# Altium PCB DAC904.PcbDoc
Units mm, origin at the board's own origin, x right, y up, seen from the top; angles counter-clockwise.
Board outline 70.36 x 53.47 mm, 2 copper layers (Top Layer, Bottom Layer); 39 components, 53 nets, 167 pads, 108 vias.
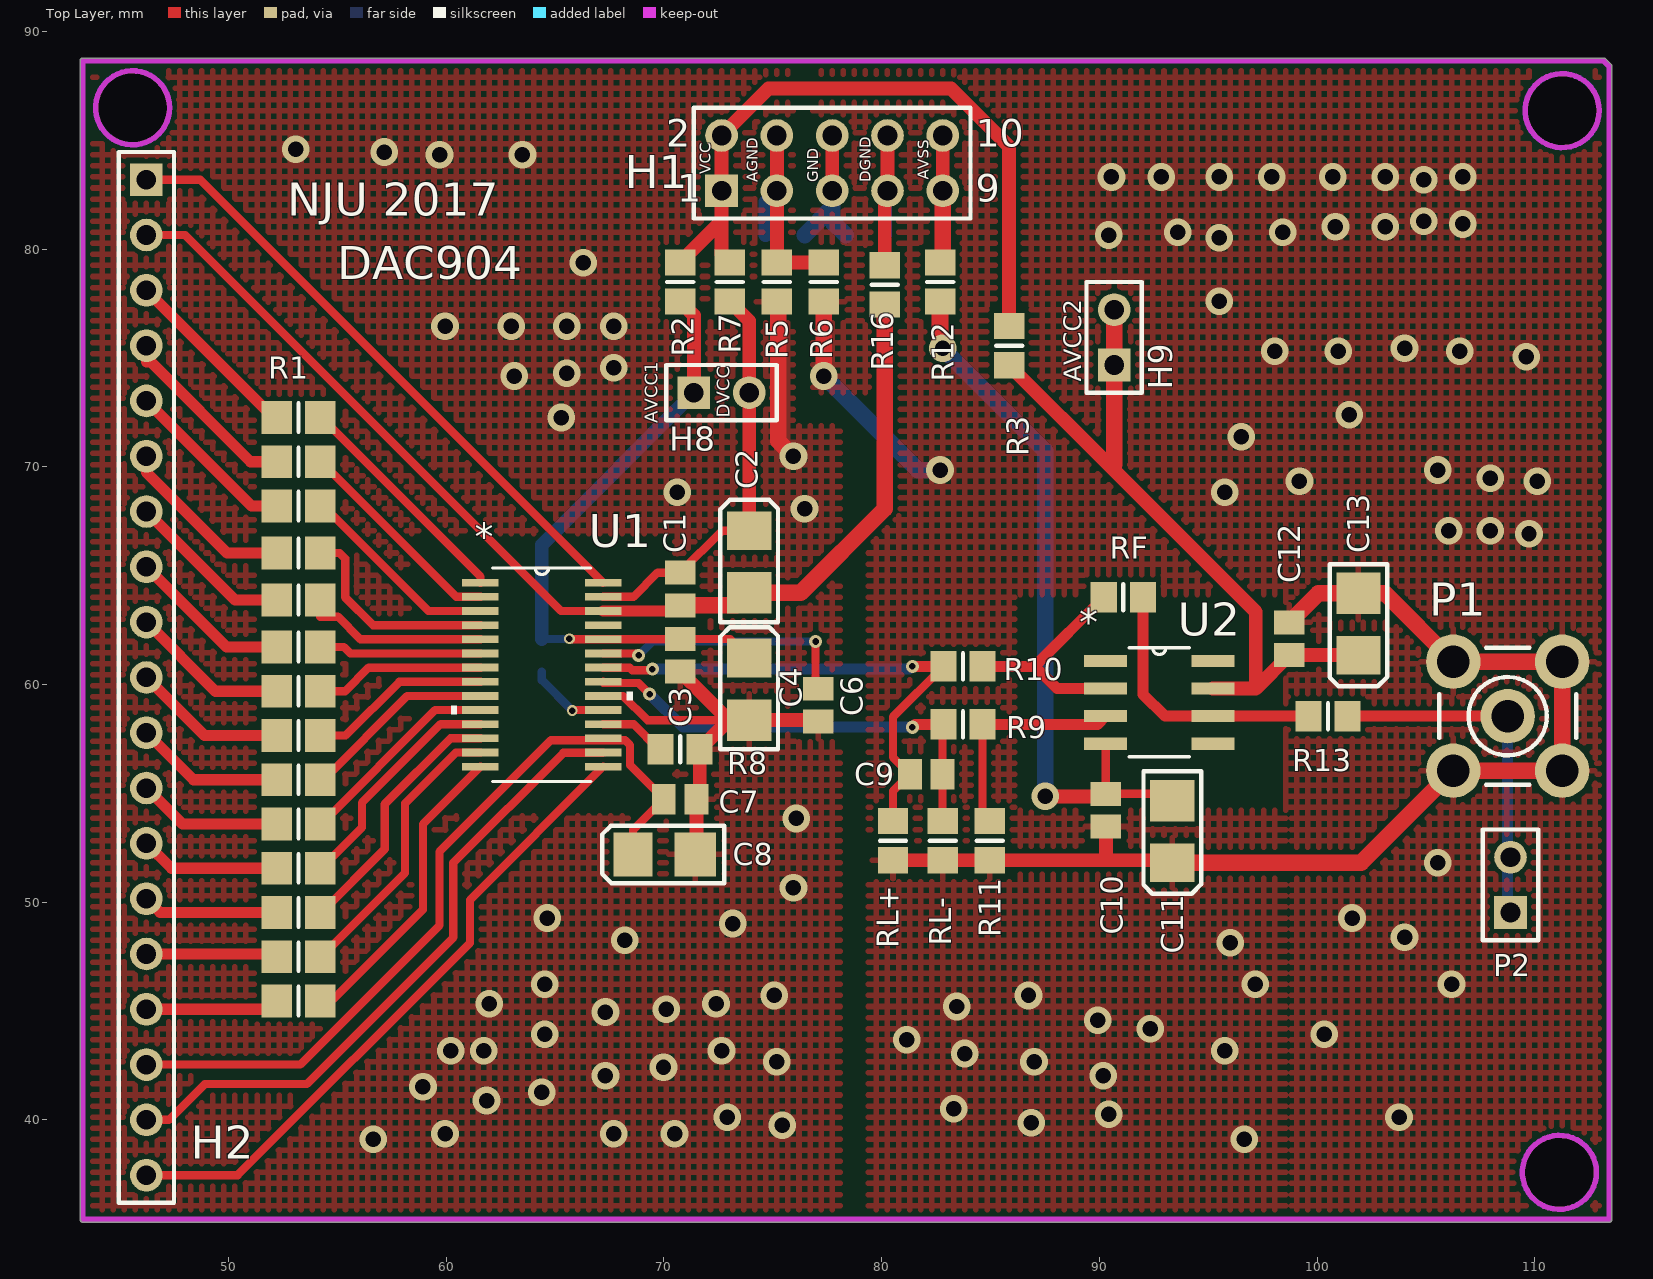
[diagram p0: Top Layer view]
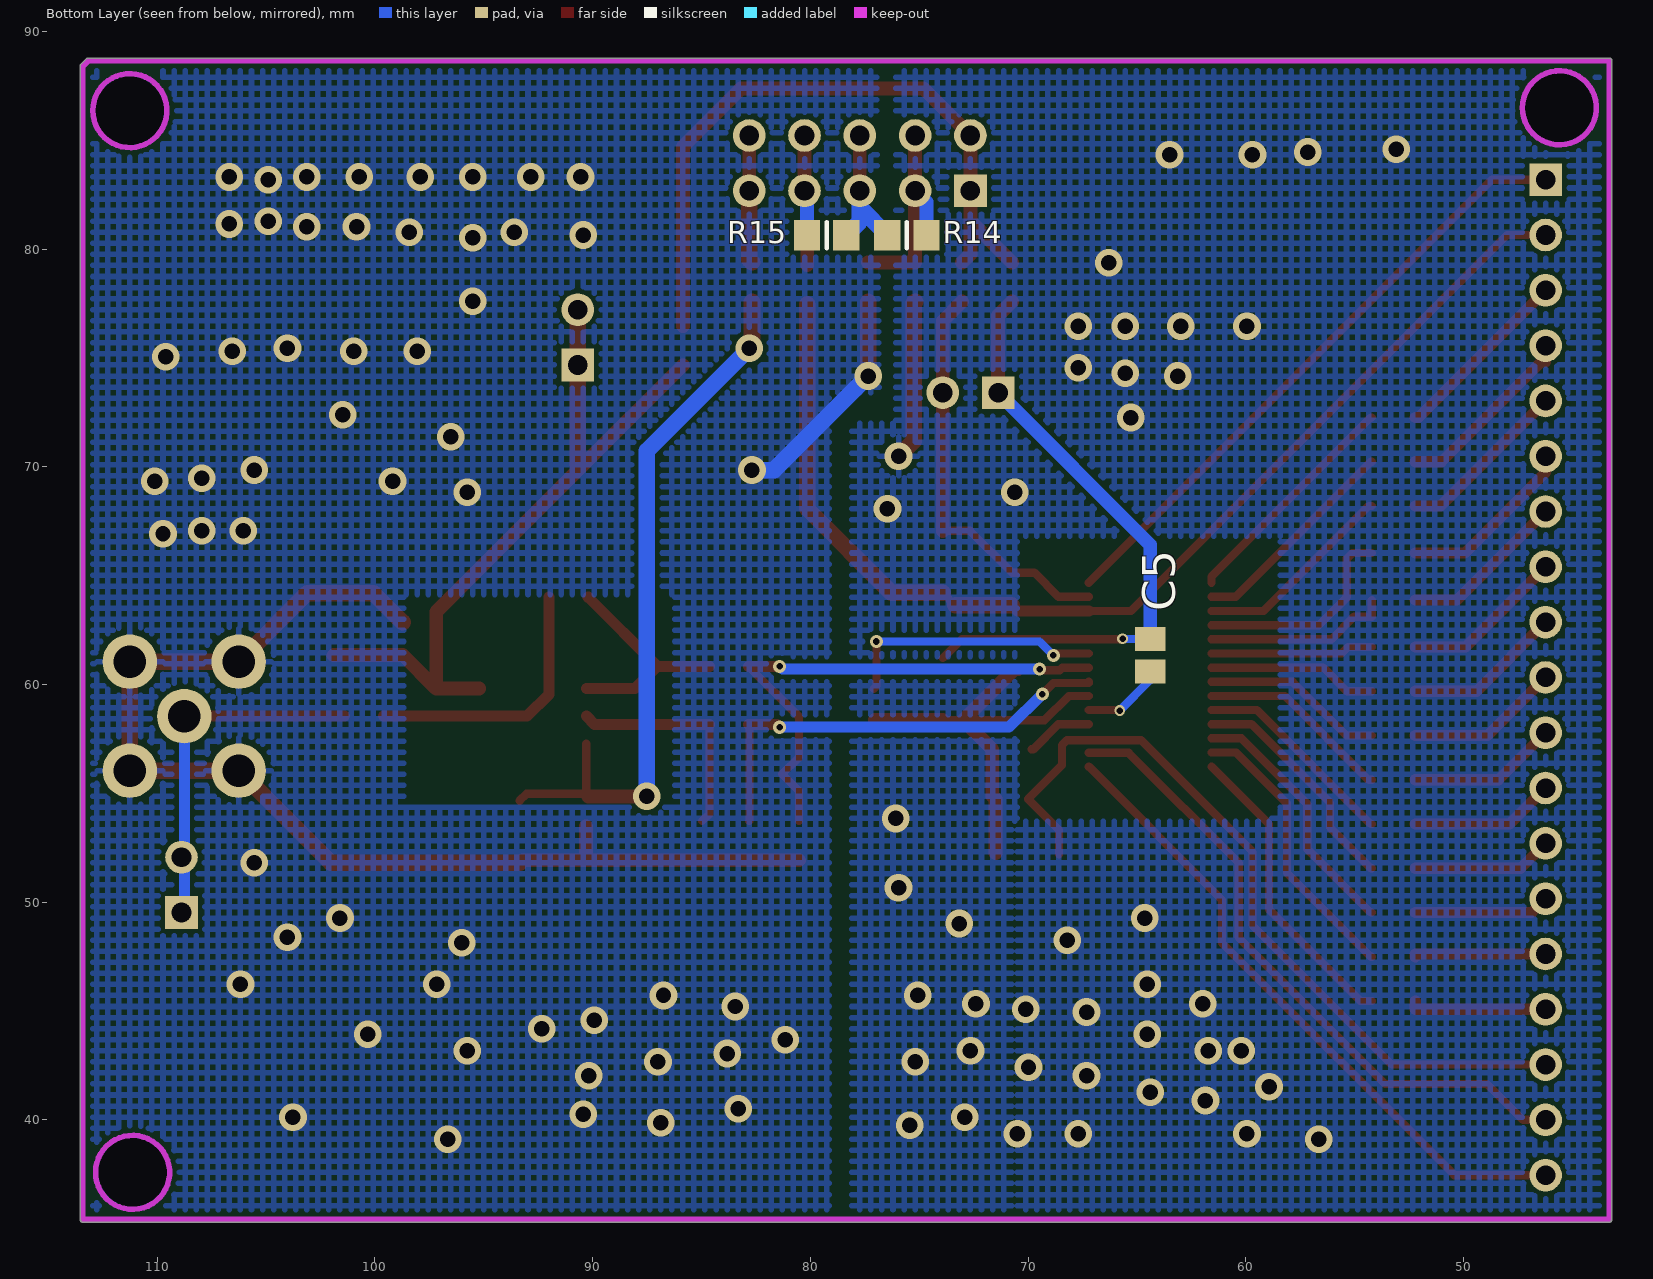
[diagram p1: Bottom Layer view, seen from below]

## Layer stack, top to bottom
Top Solder: solder mask 0.0102, Solder Resist, Dk 3.5
Top Layer: signal copper 0.0356
Dielectric 1: dielectric 0.32, FR-4, Dk 4.8
Bottom Layer: signal copper 0.0356
Bottom Solder: solder mask 0.0102, Solder Resist, Dk 3.5

## Board outline
43.18,35.433 ccw(c43.307,35.433) 43.307,35.306 113.411,35.306 ccw(c113.411,35.433) 113.538,35.433 113.538,88.392 ccw(c113.411,88.392) 113.501,88.483 113.501,88.482 113.247,88.736 113.248,88.736 ccw(c113.157,88.646) 113.157,88.773 43.307,88.773 ccw(c43.307,88.646) 43.18,88.646

## Design rules (kind name [scope] priority, off if disabled: settings)
Clearance [All] p1: gap=0.2
PolygonConnect [All] p1: connectstyle=Relief reliefconductorwidth=0.254 reliefentries=4 polygonreliefangle="90 Angle" airgapwidth=0.254
RoutingVias [All] p1: holewidth=0.711 width=1.27 viastyle="Through Hole" minholewidth=0.711 minwidth=1.27 maxholewidth=0.711 maxwidth=1.27
SolderMaskExpansion [All] p1: expansion=0.102
Width Power [InNetClass('Power')] p1: maxlimit=1.016 minlimit=0.254 preferedwidth=0.635 minimp=50.000000 maximp=50.000000 favimp=50.000000
Width GND [InNetClass('GND')] p2: maxlimit=1.016 minlimit=0.254 preferedwidth=0.762 minimp=50.000000 maximp=50.000000 favimp=50.000000
Width [All] p3: maxlimit=1.016 minlimit=0.254 preferedwidth=0.381 minimp=50.000000 maximp=50.000000 favimp=50.000000
30 further rules are at their usual default settings.

## Classes and differential pairs
net class GND: AGND1 AGND2 H1 H2 H4 H5
component class DAC904: C1 C2 C3 C4 C5 C6 C7 C8 C9 C10 C11 C12 C13 H1 H2 P1 P2 R1 R2 R3 R5 R6 R7 R8 R9 R10 R11 R12 R13 RF RL+ RL- U1 U2

## Components (designator, comment, footprint, x,y, rotation, side; value= is the part's Value field where it differs from the comment)
C1 "Cap" C0805 70.739,64.389 r90 top
C2 "Cap Pol3" CAP_SMD_3216 73.914,67.056 r270 top
C3 "Cap" C0805 70.739,61.341 r90 top
C4 "Cap Pol3" CAP_SMD_3216 73.914,61.214 r270 top
C5 "Cap" C0805 64.389,61.341 r270 bottom
C6 "Cap" C0805 77.089,59.055 r270 top
C7 "Cap" C0805 70.739,54.737 r180 top
C8 "Cap Pol3" CAP_SMD_3216 68.58,52.197 r0 top
C9 "Cap" C0805 82.042,55.88 r0 top
C10 "Cap" C0805 90.297,54.229 r90 top
C11 "Cap Pol3" CAP_SMD_3216 93.345,51.816 r90 top
C12 "Cap" C0805 98.717,62.103 r270 top
C13 "Cap Pol3" CAP_SMD_3216 101.892,61.341 r90 top
H1 "Header 5X2" HDR2X5 72.644,82.677 r0 top
H2 "Header 19" HDR1X19 46.228,83.185 r270 top
H8 "Comment" HDR1X2 71.374,73.406 r0 top
H9 "Comment" HDR1X2 90.678,74.676 r90 top
P1 "SMB" SMB_V-RJ45 108.75,58.547 r0 top
P2 "Header 2" HDR1X2 108.877,49.53 r90 top
R1 "Res Pack14" ResPack14 53.213,72.263 r0 top
R2 "Res2" 6-0805_N 70.739,78.486 r270 top
R3 "Res2" 6-0805_N 85.852,75.565 r90 top
R5 "Res2" 6-0805_N 75.184,78.486 r270 top
R6 "Res2" 6-0805_N 77.343,78.486 r90 top
R7 "Res2" 6-0805_N 73.025,78.486 r90 top
R8 "Res2" 6-0805_N 70.739,57.023 r180 top
R9 "Res2" 6-0805_N 83.731,58.166 r180 top
R10 "Res2" 6-0805_N 83.731,60.833 r180 top
R11 "Res2" 6-0805_N 84.963,52.832 r270 top
R12 "Res2" 6-0805_N 82.677,78.486 r90 top
R13 "Res2" 6-0805_N 100.495,58.547 r180 top
R14 "Res2" 6-0805_N 75.565,80.645 r180 bottom (schematic designator R6)
R15 "Res2" 6-0805_N 79.248,80.645 r180 bottom (schematic designator R6)
R16 "Res2" 6-0805_N 80.137,78.359 r90 top (schematic designator R6)
RF "Res2" 6-0805_N 91.097,64.008 r180 top
RL+ "Res2" 6-0805_N 80.518,52.832 r270 top
RL- "Res2" 6-0805_N 82.804,52.832 r270 top
U1 "DAC904_DW_28" PW28 64.389,60.452 r0 top
U2 "OPA691_D_8" D8 92.748,59.182 r0 top

## Footprints (in the part's own frame and the unit in brackets; to place one, negate y for a bottom-side part, rotate by r counter-clockwise, add the part's x,y. Pads: shape width x height; smd on the part's side, far side on the other; paste and mask are expansions set on the pad)
6-0805_N [mm] "Chip Resistor, Body 2.0x1.2mm, IPC Medium Density"
  rect 1.2x1.4 smd: 1(-0.9,0) 2(0.9,0)
  silkscreen extent 0,-0.6 0,0.6, body extent -1.07,-0.7 1.07,0.7, height 0.7
C0805 [mm] "Chip Capacitor, Body 2.0x1.3mm, IPC High Density"
  rect 1.1x1.4 smd: 1(-0.75,0) 2(0.75,0)
  body extent -1.1,-0.72 1.1,0.72, height 1.4
CAP_SMD_3216 [mil] "贴片钽电容，10uF"
  rect 70x80 smd: 1(0,0)
  rect 75x80 smd: 2(112.2,0)
  silkscreen extent -56,-52 165,52, body extent -11,-35 123,35, height 63
D8 [mil]
  rect 78x22 smd: 1(-97,75) 2(-97,25) 3(-97,-25) 4(-97,-75) 5(97,-75) 6(97,-25) 7(97,25) 8(97,75)
  silkscreen extent -54,-98 54,98, body extent -122,-98 122,98, height 69
HDR1X2 [mm] "Connector; Header; 2 Position"
  rect 1.5x1.5 hole 0.9: 1(0,0)
  round 1.5 hole 0.9: 2(2.54,0)
  silkscreen extent -1.27,-1.27 3.81,1.27
HDR1X19 [mm] "Connector; Header; 19 Position"
  rect 1.5x1.5 hole 0.9: 1(0,0)
  round 1.5 hole 0.9: 2(2.54,0) 3(5.08,0) 4(7.62,0) 5(10.16,0) 6(12.7,0) 7(15.24,0) 8(17.78,0) 9(20.32,0) 10(22.86,0) 11(25.4,0) 12(27.94,0) 13(30.48,0) 14(33.02,0) 15(35.56,0) 16(38.1,0) 17(40.64,0) 18(43.18,0) 19(45.72,0)
  silkscreen extent -1.27,-1.27 46.99,1.27
HDR2X5 [mm] "Connector; Header; 5x2 Position"
  rect 1.5x1.5 hole 0.9: 1(0,0)
  round 1.5 hole 0.9: 2(0,2.54) 3(2.54,0) 4(2.54,2.54) 5(5.08,0) 6(5.08,2.54) 7(7.62,0) 8(7.62,2.54) 9(10.16,0) 10(10.16,2.54)
  silkscreen extent -1.27,-1.27 11.43,3.81
PW28 [mil]
  rect 66x14 smd: 1(-111,166.34) 2(-111,140.75) 3(-111,115.16) 4(-111,89.57) 5(-111,63.98) 6(-111,38.39) 7(-111,12.8) 8(-111,-12.8) 9(-111,-38.39) 10(-111,-63.98) 11(-111,-89.57) 12(-111,-115.16) 13(-111,-140.75) 14(-111,-166.34) 15(111,-166.34) 16(111,-140.75) 17(111,-115.16) 18(111,-89.57) 19(111,-63.98) 20(111,-38.39) 21(111,-12.8) 22(111,12.8) 23(111,38.39) 24(111,63.98) 25(111,89.57) 26(111,115.16) 27(111,140.75) 28(111,166.34)
  silkscreen extent -164,-193 164,193
ResPack14 [mm] "Chip Resistor, Body 2.0x1.2mm, IPC Low Density"
  rect 1.4x1.5 smd: 1(-1,0) 2(-1,-2.032) 3(-1,-4.064) 4(-1,-6.223) 5(-1,-8.382) 6(-1,-10.541) 7(-1,-12.573) 8(-1,-14.605) 9(-1,-16.637) 10(-1,-18.669) 11(-1,-20.701) 12(-1,-22.733) 13(-1,-24.765) 14(-1,-26.797) 15(1,-26.797) 16(1,-24.765) 17(1,-22.733) 18(1,-20.701) 19(1,-18.669) 20(1,-16.637) 21(1,-14.605) 22(1,-12.573) 23(1,-10.541) 24(1,-8.382) 25(1,-6.223) 26(1,-4.064) 27(1,-2.032) 28(1,0)
  silkscreen extent 0,-27.45 0,0.65, body extent -1.07,-27.5 1.07,0.7, height 0.7
SMB_V-RJ45 [mm] "Connector; SMB Straight"
  round 2.5 hole 1.5: 1(0,0) 2(-2.5,-2.5) 2(-2.5,2.5) 2(2.5,-2.5) 2(2.5,2.5)
  silkscreen extent -3.15,-3.15 3.15,3.15

## Part data
C1 C3 C5 C6 C7 C9 C10 C12: "Capacitor"
C2 C4 C8 C11 C13: "Polarized Capacitor (Surface Mount)"
H1: "Header, 5-Pin, Dual row"
H2: "Header, 19-Pin"
P1: "SMB Straight Connector"
P2: "Header, 2-Pin"
R1: "Isolated Resistor Network"
R2 R3 R5 R6 R7 R8 R9 R10 R11 R12 R13 R14 R15 R16 RF RL+ RL-: "Resistor"
U1 U2: "Imported"

## Free pads (board coordinates)
  round 1.524 hole 3.15: 2(111.252,86.36) 3(111.125,37.592) 4(45.593,86.487)

## Via types
v1: diameter 1.27, hole 0.711, Top Layer to Bottom Layer, 100 vias
v2: diameter 0.6, hole 0.3, Top Layer to Bottom Layer, 6 vias
v3: diameter 0.5, hole 0.3, Top Layer to Bottom Layer, 2 vias

## Nets (pads, with @x,y where several pads share a name; then routed paths per layer and width w, separated by ;. In a path a pad name is that pad's centre, name@x,y a point inside that pad or via, vN(x,y) a via of type N, cw(c..) or ccw(c..) an arc to the next point about the centre after c; other vN are vias at no path point)
AGND: H1.3 H1.4 R5.1 R6.2 R14.2 | length 10.2
  Top Layer w0.635: H1.4 H1.3 R5.1 R6.2
  Bottom Layer w0.381: H1.3@74.665,82.158 H1.3
  Bottom Layer w0.635: R14.2 H1.3@74.665,82.158
AGND1: C3.1 C4.2 C6.2 C7.1 C8.2 R5.2 R8.1 U1.20 | length 28.1
  Top Layer w0.381: U1.20 68.127,59.477 69.24,58.364 C4.2@72.966,58.364 ; C3.1@70.415,60.591 C3.1 ; C8.2 C8.2@71.489,52.256 ; C7.1 C7.1@71.639,54.887 ; C4.2@72.966,58.35 C4.2@72.966,58.364 ; C4.2 C4.2@72.966,58.364 ; C6.2@77.03,58.364 C6.2
  Top Layer w0.635: C3.1 C4.2@72.966,58.364 ; C8.2@71.489,52.256 C7.1 ; C7.1@71.639,54.887 R8.1 C4.2@72.966,58.35 ; C4.2 C6.2@77.03,58.364
  Top Layer w0.762: R5.2 75.245,77.525 75.245,71.186 v1(75.946,70.485)
  other v1: 56.642,39.116 59.944,39.37 67.691,39.37 70.485,39.37 75.438,39.751 72.898,40.132 61.849,40.894 64.389,41.275 58.928,41.529 67.31,42.037 69.977,42.418 75.184,42.672 60.198,43.18 61.722,43.18 72.644,43.18 64.516,43.942 67.31,44.958 70.104,45.085 61.976,45.339 72.39,45.339 75.057,45.72 64.516,46.228 68.199,48.26 73.152,49.022 64.643,49.276 75.946,50.673 76.073,53.848 76.454,68.072 70.612,68.834 65.278,72.263 63.119,74.168 65.532,74.295 67.691,74.549 59.944,76.454 62.992,76.454 65.532,76.454 67.691,76.454 66.294,79.375 59.69,84.328 63.5,84.328 57.15,84.455 53.086,84.582
AGND2: C10.1 C11.1 C12.1 C13.2 P1.2 R6.1 R11.2 RL+.2 RL-.2 | length 64
  Top Layer w0.381: C11.1@93.229,51.932 C11.1
  Top Layer w0.635: RL+.2 RL-.2 R11.2 90.297,51.932 ; C10.1 90.297,51.932 ; C11.1@93.229,51.932 90.297,51.932
  Top Layer w0.762: v1(77.343,74.168) R6.1 ; C11.1 102.019,51.816 106.25,56.047 111.25,56.047 111.25,61.047 106.25,61.047 103.106,64.191 C13.2 100.055,64.191 C12.1
  Bottom Layer w0.762: v1(77.343,74.168) 81.661,69.85 v1(82.677,69.85)
  other v1: 96.647,39.116 86.868,39.878 103.759,40.132 90.424,40.259 83.312,40.513 90.17,42.037 86.995,42.672 83.82,43.053 95.758,43.18 81.153,43.688 100.33,43.942 92.329,44.196 89.916,44.577 83.439,45.212 86.741,45.72 97.155,46.228 106.172,46.228 96.012,48.133 104.013,48.387 101.6,49.276 105.537,51.816 109.728,66.929 106.045,67.056 107.95,67.056 95.758,68.834 99.187,69.342 110.109,69.342 107.95,69.469 105.537,69.85 96.52,71.374 101.473,72.39 109.601,75.057 98.044,75.311 100.965,75.311 106.553,75.311 104.013,75.438 95.504,77.597 95.504,80.518 90.424,80.645 93.599,80.772 98.425,80.772 100.838,81.026 103.124,81.026 106.68,81.153 104.902,81.28 104.902,83.185 90.551,83.312 92.837,83.312 95.504,83.312 97.917,83.312 100.711,83.312 103.124,83.312 106.68,83.312
AVCC1: C3.2 C4.1 C5.1 H8.1 R2.2 U1.24 | length 28.5
  Top Layer w0.381: v3(65.659,62.103) 65.685,62.077 U1.24 70.725,62.077 C3.2 73.037,62.091 C4.1
  Top Layer w0.635: R2.2 71.374,76.951 H8.1
  Bottom Layer w0.381: C5.1 v3@65.647,62.091
  Bottom Layer w0.635: C5.1 64.389,66.421 H8.1
AVCC2: C12.2 C13.1 H9.1 H9.2 R3.1 U2.7 | length 34.2
  Top Layer w0.381: 90.551,69.966 90.678,70.093
  Top Layer w0.635: R3.1 90.551,69.966 97.181,63.336 97.181,59.817 ; U2.7 97.181,59.817 ; C13.1 101.88,61.353 C12.2 97.181,59.817
  Top Layer w0.762: 90.678,70.093 H9.1 H9.2
CLK: H2.1 U1.28 | length 28.6
  Top Layer w0.381: H2.1 48.7,83.185 U1.28
DGND: H1.7 H1.8 R15.1 R16.2 | length 8.1
  Top Layer w0.381: H1.7@80.137,82.55 H1.7
  Top Layer w0.635: R16.2 H1.7@80.137,82.55 ; H1.7 H1.8
  Bottom Layer w0.381: H1.7@80.148,82.561 H1.7
  Bottom Layer w0.635: R15.1 H1.7@80.148,82.561
DVCC: C1.2 C2.1 H8.2 R7.1 U1.27 | length 18.9
  Top Layer w0.381: U1.27 68.599,64.027 69.711,65.139 C1.2 72.656,67.056 C2.1
  Top Layer w0.635: R7.1 73.914,76.697 C2.1
H1: H1.1 H1.2 R2.1 R3.2 R7.2 | length 32.1
  Top Layer w0.635: R2.1 72.644,81.291 ; R7.2 72.644,79.767 72.644,81.291 ; R3.2 85.852,84.709 83.185,87.376 74.803,87.376 H1.2 H1.1 72.644,81.291
H2: H1.5 H1.6 R14.1 R15.2 | length 6.6
  Top Layer w0.635: H1.5 H1.6
  Bottom Layer w0.762: R14.1 77.724,81.904 ; H1.5 77.724,81.904 ; R15.2 77.724,81.269 77.724,81.904
H4: C1.1 C2.2 H2.2 R16.1 U1.26 | length 52.4
  Top Layer w0.381: H2.2 48.006,80.645 65.274,63.377 U1.26 ; C1.1@70.477,63.377 C1.1 ; C2.2@73.347,63.639 C2.2
  Top Layer w0.508: U1.26 C1.1@70.477,63.377
  Top Layer w0.762: C1.1 C2.2@73.347,63.639 ; C2.2 76.271,64.206 80.137,68.072 R16.1
H5: H1.9 H1.10 R12.2 | length 5.9
  Top Layer w0.635: H1.9 H1.10
  Top Layer w0.762: R12.2 82.804,79.513 H1.9
INT/EXT: H2.18 U1.16 | length 30
  Top Layer w0.381: H2.18 47.26,40.005 48.911,41.656 53.594,41.656 60.325,48.387 60.325,51.816 65.373,56.864 U1.16@67.208,56.864
IOUT+: C9.1 R10.2 RL+.1 U1.22 | length 24.5
  Top Layer w0.381: U1.22 68.421,60.777 68.548,60.651 69.414,60.651 v2(69.469,60.706) ; RL+.1 80.518,55.106 C9.1 80.518,56.654 80.518,58.52 R10.2
  Top Layer w0.508: v2(81.407,60.833) R10.2
  Bottom Layer w0.381: v2@81.28,60.706 v2(81.407,60.833)
  Bottom Layer w0.508: v2(69.469,60.706) v2@81.28,60.706
IOUT-: C9.2 R9.2 RL-.1 U1.21 | length 21
  Top Layer w0.381: U1.21 67.208,60.07 68.835,60.07 v2(69.342,59.563) ; v2(81.407,58.039) v2@81.534,58.166 ; RL-.1 82.792,53.744 C9.2 82.792,58.127 R9.2
  Top Layer w0.508: v2@81.534,58.166 R9.2
  Bottom Layer w0.508: v2(69.342,59.563) 70.866,58.039 v2(81.407,58.039)
NetC5_2: C5.2 U1.19 | length 3.8
  Top Layer w0.381: v3(65.786,58.801) 65.812,58.827 U1.19
  Bottom Layer w0.381: C5.2 64.389,60.198 v3(65.786,58.801)
NetC6_1: C6.1 U1.23 | length 12.3
  Top Layer w0.381: U1.23 68.748,61.427 v2(68.834,61.341) ; v2(76.962,61.976) 76.962,59.932 C6.1
  Bottom Layer w0.381: v2(68.834,61.341) 69.469,61.976 v2(76.962,61.976)
NetH2_3: H2.3 R1.1 | length 8.4
  Top Layer w0.508: H2.3 52.07,72.263 R1.1
NetH2_4: H2.4 R1.2 | length 8.6
  Top Layer w0.508: H2.4 46.228,74.803 46.431,74.803 51.003,70.231 R1.2
NetH2_5: H2.5 R1.3 | length 8
  Top Layer w0.508: H2.5 51.054,68.199 R1.3
NetH2_6: H2.6 R1.4 | length 8.3
  Top Layer w0.508: H2.6 46.228,69.734 49.922,66.04 R1.4
NetH2_7: H2.7 R1.5 | length 7.7
  Top Layer w0.508: H2.7 50.292,63.881 R1.5
NetH2_8: H2.8 R1.6 | length 7.5
  Top Layer w0.508: H2.8 49.911,61.722 R1.6
NetH2_9: H2.9 R1.7 | length 7.3
  Top Layer w0.508: H2.9 49.403,59.69 R1.7
NetH2_10: H2.10 R1.8 | length 7.1
  Top Layer w0.508: H2.10 48.895,57.658 R1.8
NetH2_11: H2.11 R1.9 | length 6.9
  Top Layer w0.508: H2.11 48.387,55.626 R1.9
NetH2_12: H2.12 R1.10 | length 6.7
  Top Layer w0.508: H2.12 47.879,53.594 R1.10
NetH2_13: H2.13 R1.11 | length 6.5
  Top Layer w0.508: H2.13 47.371,51.562 R1.11
NetH2_14: H2.14 R1.12 | length 6.2
  Top Layer w0.508: H2.14 46.863,49.53 R1.12
NetH2_15: H2.15 R1.13 | length 6.1
  Top Layer w0.508: H2.15 52.213,47.625 R1.13
NetH2_16: H2.16 R1.14 | length 6.4
  Top Layer w0.508: H2.16 52.213,45.085 R1.14
NetP1_1: P1.1 P2.1 P2.2 R13.1 | length 16.2
  Top Layer w0.508: R13.1 P1.1
  Bottom Layer w0.508: P2.1@108.75,49.657 108.75,52.07 P1.1
NetR1_15: R1.15 U1.14 | length 14.1
  Top Layer w0.381: R1.15 54.737,45.466 58.928,49.657 58.928,53.585 U1.14
NetR1_16: R1.16 U1.13 | length 13.1
  Top Layer w0.381: R1.16 54.26,47.498 58.107,51.345 58.107,54.542 60.442,56.877 U1.13
NetR1_17: R1.17 U1.12 | length 11.9
  Top Layer w0.381: R1.17 54.26,49.53 57.174,52.445 57.174,54.507 60.194,57.527 U1.12
NetR1_18: R1.18 U1.11 | length 10.8
  Top Layer w0.381: R1.18 54.26,51.562 56.134,53.436 56.134,54.57 59.741,58.177 U1.11
NetR1_19: R1.19 U1.10 | length 9.5
  Top Layer w0.381: R1.19 54.26,53.594 59.493,58.827 U1.10
NetR1_20: R1.20 U1.9 | length 9
  Top Layer w0.381: R1.20 54.356,55.626 58.207,59.477 U1.9
NetR1_21: R1.21 U1.8 | length 8.4
  Top Layer w0.381: R1.21 55.372,57.658 57.841,60.127 U1.8
NetR1_22: R1.22 U1.7 | length 7.8
  Top Layer w0.381: R1.22 55.347,59.69 56.434,60.777 U1.7
NetR1_23: R1.23 U1.6 | length 7.5
  Top Layer w0.381: R1.23 55.296,61.722 55.591,61.427 U1.6
NetR1_24: R1.24 U1.5 | length 8.6
  Top Layer w0.381: R1.24 54.213,63.119 55.016,63.119 56.058,62.077 U1.5
NetR1_25: R1.25 U1.4 | length 9.8
  Top Layer w0.381: R1.25 55.104,66.04 55.358,65.786 55.358,64.008 56.639,62.727 U1.4
NetR1_26: R1.26 U1.3 | length 9.4
  Top Layer w0.381: R1.26 54.356,68.199 59.178,63.377 U1.3
NetR1_27: R1.27 U1.2 | length 9.9
  Top Layer w0.381: R1.27 54.26,70.231 60.464,64.027 U1.2
NetR1_28: R1.28 U1.1 | length 10.7
  Top Layer w0.381: R1.28 54.26,72.263 61.57,64.953 U1.1
NetR8_2: R8.2 U1.18 | length 3.1
  Top Layer w0.381: U1.18 68.605,58.177 69.759,57.023 R8.2
NetR9_1: R9.1 R11.1 U2.3 | length 10.4
  Top Layer w0.381: R9.1 84.631,54.064 R11.1
  Top Layer w0.508: R9.1 89.903,58.166 U2.3
NetR10_1: R10.1 RF.2 U2.2 | length 10.6
  Top Layer w0.508: R10.1 87.033,60.833 ; RF.2 87.033,60.844 87.033,60.833 ; U2.2 88.049,59.817 87.033,60.833
NetR13_2: R13.2 RF.1 U2.6 | length 12.5
  Top Layer w0.508: RF.1 91.997,59.552 93.002,58.547 U2.6 R13.2
PD: H2.19 U1.15 | length 29.9
  Top Layer w0.381: H2.19 50.419,37.465 61.087,48.133 61.087,50.106 U1.15
VREF: C7.2 C8.1 H2.17 U1.17 | length 36.7
  Top Layer w0.381: H2.17 53.294,42.545 59.69,48.941 59.69,52.324 64.811,57.445 68.208,57.445 68.437,57.217 68.437,56.298 69.989,54.746 C7.2 68.58,53.328 C8.1
VSS: C10.2 C11.2 R12.1 U2.4 | length 33
  Top Layer w0.381: v1@82.677,75.565 v1(82.804,75.438) ; v1(87.503,54.864) v1@87.871,54.864 ; C10.2@90.182,54.864 C10.2 ; U2.4 90.284,54.992 C10.2 ; C11.2 93.032,54.979 C10.2
  Top Layer w0.635: v1@87.871,54.864 C10.2@90.182,54.864
  Top Layer w0.762: v1@82.677,75.565 R12.1
  Bottom Layer w0.762: v1(82.804,75.438) 87.503,70.739 v1(87.503,54.864)
pads on no net: U1.25 U2.1 U2.5 U2.8

## Polygon pours and split planes (outlines as drawn)
AGND1 on Top Layer "AGND1" (hatched 90Degree grid 0.508 track 0.254, pour order 10): 43.307,88.392 43.688,88.773 75.946,88.773 75.946,72.009 76.073,71.882 78.105,71.882 78.105,35.56 78.232,35.433 70.485,35.433 70.485,66.675 70.612,66.802 70.485,66.929 58.293,66.929 58.293,54.102 58.42,53.975 70.612,53.975 70.612,35.687 70.739,35.56 70.612,35.433 43.307,35.433 43.307,88.392
AGND2 on Top Layer "AGND2" (hatched 90Degree grid 0.508 track 0.254, pour order 6): 76.835,88.646 113.157,88.646 113.157,35.56 98.552,35.56 98.425,35.433 98.552,35.56 98.552,64.135 86.36,64.135 86.106,64.389 86.106,54.229 98.552,54.229 98.806,53.975 98.806,35.433 79.502,35.433 79.375,35.56 79.375,73.406 76.835,73.406
AGND1 on Bottom Layer "AGND1" (hatched 90Degree grid 0.508 track 0.254, pour order 12): 43.307,88.646 76.073,88.646 76.073,72.009 78.105,72.009 78.105,35.433 77.851,35.687 70.485,35.687 70.485,66.675 70.358,66.802 58.42,66.802 58.42,54.229 58.928,53.721 70.739,53.721 70.739,35.687 70.612,35.56 70.485,35.687 43.307,35.687
AGND2 on Bottom Layer "AGND2" (hatched 90Degree grid 0.508 track 0.254, pour order 8): 76.962,88.646 77.089,88.519 113.284,88.519 113.284,35.814 113.411,35.687 113.284,35.814 98.679,35.814 98.679,64.008 98.806,64.135 86.233,64.135 86.233,54.61 86.106,54.483 86.233,54.356 98.679,54.356 98.679,35.814 98.806,35.687 98.552,35.433 79.121,35.433 79.121,73.279 78.994,73.406 76.835,73.406

## Keep-outs
Keep-Out Layer:
  circle w0.254: c45.593,86.487 r1.7
  circle w0.254: c111.252,86.36 r1.7
  circle w0.254: c111.125,37.592 r1.7
  lines w0.254: 43.307,35.433 113.411,35.433 113.411,88.392 113.157,88.646 43.307,88.646 43.307,35.433

## Silkscreen, mask and mechanical layers (free items; w line width, h text height)
Top Overlay:
  text "VCC" at 72.136,83.439 h0.5 r90
  text "AVSS" at 82.169,83.185 h0.5 r90
  text "AGND" at 74.295,83.058 h0.5 r90
  text "GND" at 77.089,83.058 h0.5 r90
  text "DGND" at 79.502,83.058 h0.5 r90
  text "NJU 2017" at 52.705,81.534 h1.52
  text "DAC904" at 54.991,78.613 h1.52
  text "AVCC2" at 89.154,73.914 h0.8 r90
  text "DVCC" at 73.025,72.263 h0.6 r90
  text "AVCC1" at 69.723,72.009 h0.6 r90

## Text inside footprints (layer, text, board x,y; h text height)
H1: Top Overlay "2" at 70.104,84.709 h1.27; Top Overlay "1" at 70.612,82.169 h1.27; Top Overlay "9" at 84.328,82.169 h1.27; Top Overlay "10" at 84.328,84.709 h1.27
U1: Top Overlay "*" at 61.316,66.176 h1.27; Mechanical 13 "*" at 61.316,66.176 h1.27
U2: Top Overlay "*" at 89.065,62.23 h1.27